# EAGLE board 00A-120-A (EAGLE 9.6.2)
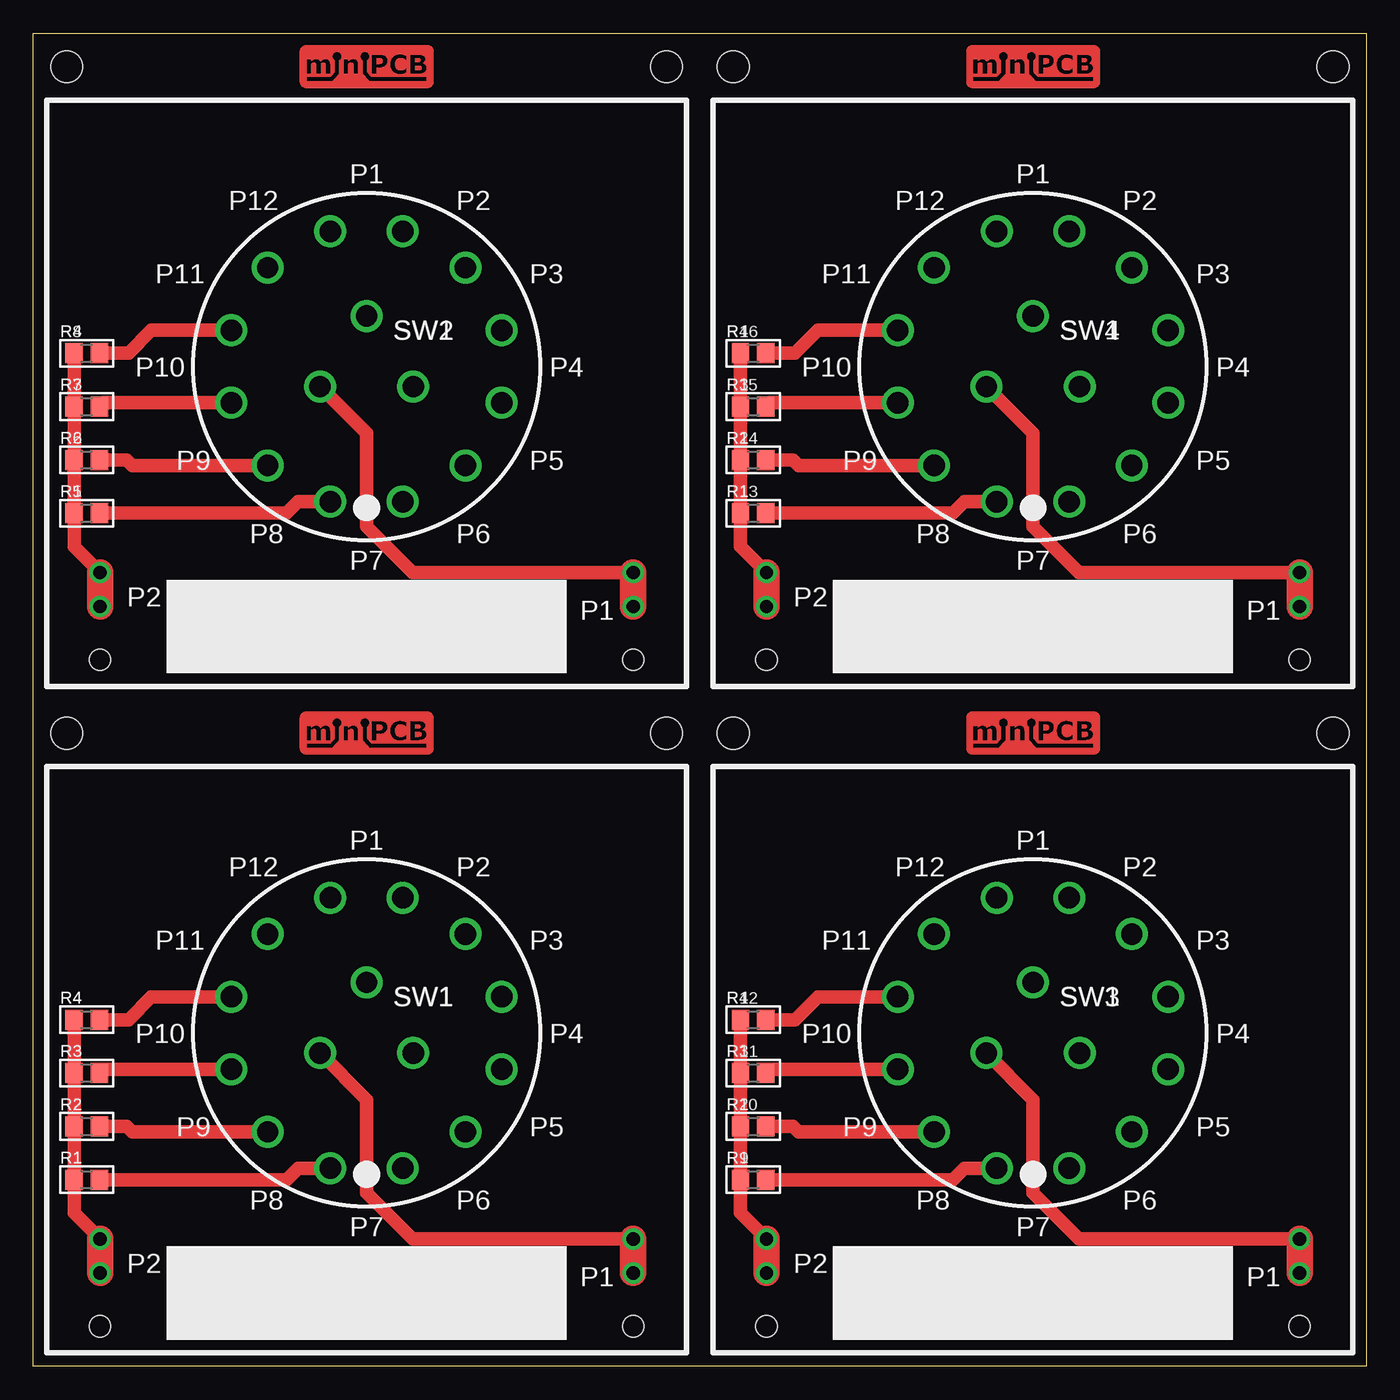
[diagram p0: board, top side]
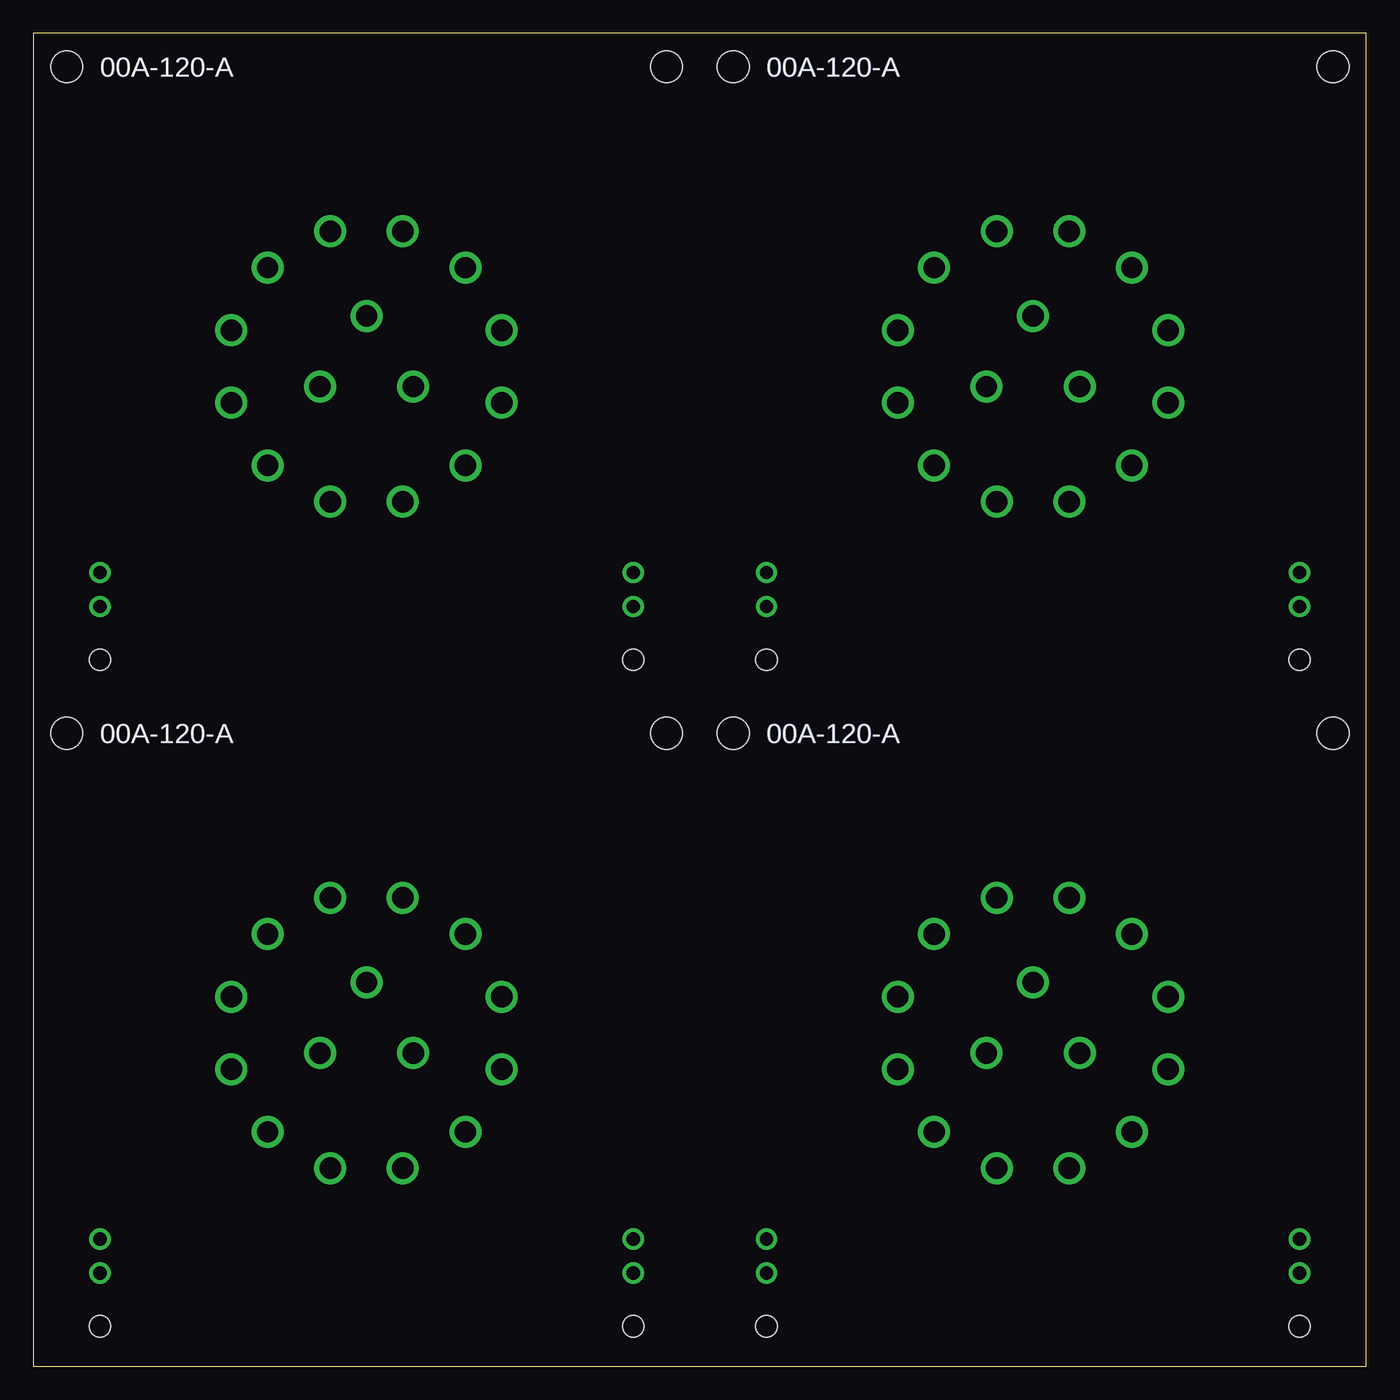
[diagram p1: board, bottom side, seen from below]

Size 100 x 100 mm. Coordinates in mm from the lower left corner, seen from the top.
Outline: 0,0 0,100 100,100 100,0 0,0
Copper layers (1*16): Top 0.035mm / dielectric 0.15mm / Bottom 0.035mm
Design rules "default": minimum track width 6mil, minimum drill 0.35mm, track to track 6mil, track to pad 6mil, pad to pad 6mil, via to via 6mil, smd to smd 6mil, copper to edge 40mil, drill to drill 6mil, minimum pad ring 10mil, minimum via ring 8mil, stop-mask expansion 4mil, vias tented up to drill 0mil, thermal gap 10mil

## Footprints (pad centres in the part's own frame; a part is rotated, then mirrored left to right if it is on the bottom)
PINS_1_1MM-NOTEXT = drill 1 pad 1.6: 1 4,0; 2 6.54,0 | hole 1.6: 0,0
MINIPCB_0P_50X50MM = hole 2.4: 47.5,47.5; 2.5,47.5
R0805 = smd 1.3 x 1.5: 1 -0.95,0; 2 0.95,0
SWITCH-ROTARY-3P4T = drill 1.6: 1 -2.718,-10.142; 2 -7.425,-7.425; 3 -10.142,-2.718; 4 -10.142,2.718; 5 -7.425,7.425; 6 -2.718,10.142; 7 2.718,10.142; 8 7.425,7.425; 9 10.142,2.718; 10 10.142,-2.718; 11 7.425,-7.425; 12 2.718,-10.142; A -3.5,-1.5; B 0,3.8; C 3.5,-1.5

## Placement (x,y rotation side)
E$1  [MINIPCB_PANEL_IMAGEFRAME]  -25,-35 0 top  (outside the outline)
P1  [PINS_1_1MM-NOTEXT]  45,3 90 top
P2  [PINS_1_1MM-NOTEXT]  5,3 90 top
P3  [PINS_1_1MM-NOTEXT]  45,53 90 top
P4  [PINS_1_1MM-NOTEXT]  5,53 90 top
P5  [PINS_1_1MM-NOTEXT]  95,3 90 top
P6  [PINS_1_1MM-NOTEXT]  55,3 90 top
P7  [PINS_1_1MM-NOTEXT]  95,53 90 top
P8  [PINS_1_1MM-NOTEXT]  55,53 90 top
PCB1  [MINIPCB_0P_50X50MM]  0,0 0 top
PCB2  [MINIPCB_0P_50X50MM]  0,50 0 top
PCB3  [MINIPCB_0P_50X50MM]  50,0 0 top
PCB4  [MINIPCB_0P_50X50MM]  50,50 0 top
R1  [R0805]  4,14 0 top
R2  [R0805]  4,18 0 top
R3  [R0805]  4,22 0 top
R4  [R0805]  4,26 0 top
R5  [R0805]  4,64 0 top
R6  [R0805]  4,68 0 top
R7  [R0805]  4,72 0 top
R8  [R0805]  4,76 0 top
R9  [R0805]  54,14 0 top
R10  [R0805]  54,18 0 top
R11  [R0805]  54,22 0 top
R12  [R0805]  54,26 0 top
R13  [R0805]  54,64 0 top
R14  [R0805]  54,68 0 top
R15  [R0805]  54,72 0 top
R16  [R0805]  54,76 0 top
SW1  [SWITCH-ROTARY-3P4T]  25,25 0 top
SW2  [SWITCH-ROTARY-3P4T]  25,75 0 top
SW3  [SWITCH-ROTARY-3P4T]  75,25 0 top
SW4  [SWITCH-ROTARY-3P4T]  75,75 0 top

## Library data of the parts
E$1 P1-P8 R1-R16 SW1-SW4 = minipcb
PCB1-PCB4 = minipcb; NAME1: TEST SETUP; PART_NUMBER: 00A-120-A; REVISION: A

## Nets
N$1: P1.1 P1.2 SW1.A
N$2: R1.2 SW1.1
N$3: R2.2 SW1.2
N$4: R3.2 SW1.3
N$5: R4.2 SW1.4
N$6: P3.1 P3.2 SW2.A
N$7: R5.2 SW2.1
N$8: R6.2 SW2.2
N$9: R7.2 SW2.3
N$10: R8.2 SW2.4
N$11: P4.1 P4.2 R5.1 R6.1 R7.1 R8.1
N$12: P5.1 P5.2 SW3.A
N$13: R9.2 SW3.1
N$14: P2.1 P2.2 R1.1 R2.1 R3.1 R4.1
N$15: R10.2 SW3.2
N$16: R11.2 SW3.3
N$17: R12.2 SW3.4
N$18: P6.1 P6.2 R9.1 R10.1 R11.1 R12.1
N$19: P7.1 P7.2 SW4.A
N$20: R13.2 SW4.1
N$21: R14.2 SW4.2
N$22: R15.2 SW4.3
N$23: R16.2 SW4.4
N$24: P8.1 P8.2 R13.1 R14.1 R15.1 R16.1

## Tracks (layer width: path | path; a pad name or v marks a point on that pad's centre or on a via)
N$1
  Top 1: SW1.A 25,20 25,13 28.46,9.54 P1.2
  Top 2: P1.1 P1.2
N$2
  Top 1: R1.2 19,14 19.86,14.86 SW1.1
N$3
  Top 1: R2.2 7,18 7.42,17.57 SW1.2
N$4
  Top 1: R3.2 5.23,22.28 SW1.3
N$5
  Top 1: R4.2 7.14,26 8.86,27.72 SW1.4
N$6
  Top 1: SW2.A 25,70 25,63 28.46,59.54 P3.2
  Top 2: P3.1 P3.2
N$7
  Top 1: R5.2 19,64 19.86,64.86 SW2.1
N$8
  Top 1: R6.2 7,68 7.42,67.58 SW2.2
N$9
  Top 1: R7.2 5.23,72.28 SW2.3
N$10
  Top 1: R8.2 7.14,76 8.86,77.72 SW2.4
N$11
  Top 1: R8.1 R7.1 R6.1 R5.1 3.05,61.49 P4.2
  Top 2: P4.1 P4.2
N$12
  Top 1: SW3.A 75,20 75,13 78.46,9.54 P5.2
  Top 2: P5.1 P5.2
N$13
  Top 1: R9.2 69,14 69.86,14.86 SW3.1
N$14
  Top 1: R4.1 R3.1 R2.1 R1.1 3.05,11.49 P2.2
  Top 2: P2.1 P2.2
N$15
  Top 1: R10.2 57,18 57.42,17.57 SW3.2
N$16
  Top 1: R11.2 55.23,22.28 SW3.3
N$17
  Top 1: R12.2 57.14,26 58.86,27.72 SW3.4
N$18
  Top 1: R12.1 R11.1 R10.1 R9.1 53.05,11.49 P6.2
  Top 2: P6.1 P6.2
N$19
  Top 1: SW4.A 75,70 75,63 78.46,59.54 P7.2
  Top 2: P7.1 P7.2
N$20
  Top 1: R13.2 69,64 69.86,64.86 SW4.1
N$21
  Top 1: R14.2 57,68 57.42,67.58 SW4.2
N$22
  Top 1: R15.2 55.23,72.28 SW4.3
N$23
  Top 1: R16.2 57.14,76 58.86,77.72 SW4.4
N$24
  Top 1: R16.1 R15.1 R14.1 R13.1 53.05,61.49 P8.2
  Top 2: P8.1 P8.2

## Text on the board
tPlace: P2 | P2 | P1 | P1 | P2 | P2 | P1 | P1
_tNames: R4 | SW1 | R4 | SW1 | R3 | R3 | R2 | R2 | R1 | R1 | R4 | SW1 | R4 | SW1 | R3 | R3 | R2 | R2 | R1 | R1